# Altium PCB hall_strip.PcbDoc (part 2 of 2)
Units mm, origin at the board's own origin, x right, y up, seen from the top; angles counter-clockwise.
Board outline 200 x 15 mm, 2 copper layers (Top Layer, Bottom Layer); 100 components, 6 nets, 261 pads, 183 vias.
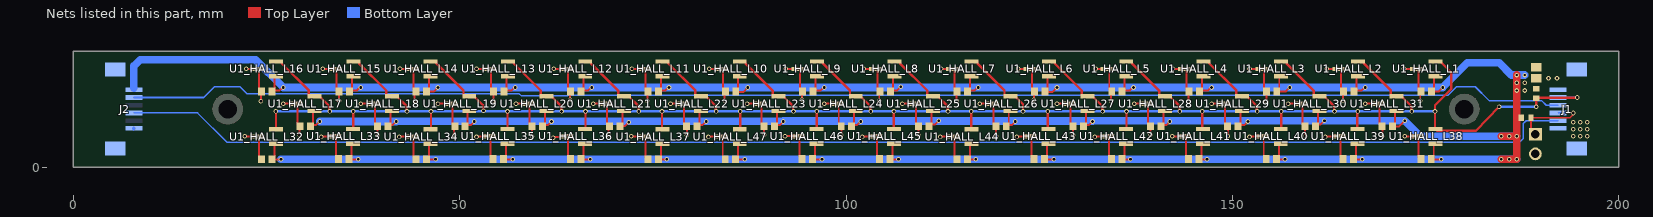
[diagram p2: the nets of this part, all layers, seen from the top]

## Part data
C1_HALL_L1 C1_HALL_L2 C1_HALL_L3 C1_HALL_L4 C1_HALL_L5 C1_HALL_L6 C1_HALL_L7 C1_HALL_L8 C1_HALL_L9 C1_HALL_L10 C1_HALL_L11 C1_HALL_L12 C1_HALL_L13 C1_HALL_L14 C1_HALL_L15 C1_HALL_L16 C1_HALL_L17 C1_HALL_L18 C1_HALL_L19 C1_HALL_L20 C1_HALL_L21 C1_HALL_L22 C1_HALL_L23 C1_HALL_L24 C1_HALL_L25 C1_HALL_L26 C1_HALL_L27 C1_HALL_L28 C1_HALL_L29 C1_HALL_L30 C1_HALL_L31 C1_HALL_L32 C1_HALL_L33 C1_HALL_L34 C1_HALL_L35 C1_HALL_L36 C1_HALL_L37 C1_HALL_L38 C1_HALL_L39 C1_HALL_L40 C1_HALL_L41 C1_HALL_L42 C1_HALL_L43 C1_HALL_L44 C1_HALL_L45 C1_HALL_L46 C1_HALL_L47: library part CMP-2006-03300-1, Manufacturer=Kemet, Part Number=C0603X104K5RACTU
C2: library part CMP-2007-03243-1, Manufacturer=Kemet, Part Number=C0805C106K8PACTU
J1 J2: library part CMP-1502-01454-1, "SMT ZIF Connectors WR-FPC, Horizontal, Bottom Contact, pitch 1 mm, 6 pins", Contact Resistance=20mOhm, Manufacturer="Wurth Elektronik", Operating Temperature=-25to85degC, Rated Current=1A, Withstanding Voltage=500VAC, Working Voltage=125VAC, Contact Design=BottomContact, Datasheet URL=https://katalog.we-online.de/em/datasheet/68610614422.pdf, Manufacturer URL=http://www.we-online.de, Mounting Technology=SMT, Orientation=Horizontal, Package Reference=68610614422, Packaging=TapeandReel, Part Number=68610614422, Pin Number=6, Pitch=1mm, Publisher=WurthElektronik, System=Connector
P1: library part CMP-1502-01059-1, "THT Angled Pin Header WR-PHD, Pitch 2.54 mm, Single Row, 2 pins", Contact Resistance=20mOhm, Manufacturer="Wurth Elektronik", Operating Temperature=-40to105degC, Rated Current=3A, Withstanding Voltage=500VAC, Working Voltage=250VAC, Datasheet URL=https://katalog.we-online.de/em/datasheet/6130xx11021.pdf, Gender=Male, Manufacturer URL=http://www.we-online.de, Mounting Technology=THT, Orientation=Angled, Package Reference=61300211021, Packaging=Bag, Part Number=61300211021, Pin Number=2, Pitch=2.54mm, Publisher=WurthElektronik, Row Number=Single
R1 R2: library part CMP-2000-00181-1, Manufacturer=Panasonic, Part Number=ERJ-3EKF1002V
U1_HALL_L1 U1_HALL_L2 U1_HALL_L3 U1_HALL_L4 U1_HALL_L5 U1_HALL_L6 U1_HALL_L7 U1_HALL_L8 U1_HALL_L9 U1_HALL_L10 U1_HALL_L11 U1_HALL_L12 U1_HALL_L13 U1_HALL_L14 U1_HALL_L15 U1_HALL_L16 U1_HALL_L17 U1_HALL_L18 U1_HALL_L19 U1_HALL_L20 U1_HALL_L21 U1_HALL_L22 U1_HALL_L23 U1_HALL_L24 U1_HALL_L25 U1_HALL_L26 U1_HALL_L27 U1_HALL_L28 U1_HALL_L29 U1_HALL_L30 U1_HALL_L31 U1_HALL_L32 U1_HALL_L33 U1_HALL_L34 U1_HALL_L35 U1_HALL_L36 U1_HALL_L37 U1_HALL_L38 U1_HALL_L39 U1_HALL_L40 U1_HALL_L41 U1_HALL_L42 U1_HALL_L43 U1_HALL_L44 U1_HALL_L45 U1_HALL_L46 U1_HALL_L47: library part CMP-1148-00005-1, "Low Power Hall Switch, PG-SC59, Reel, Green", Manufacturer=Infineon, PartNumber=TLE4913, Bhyst (25degreesC) max="0.8 mT", Bop (25degreesC) min="3.5 mT", Brp (25degreesC) typ="2.7 mT", Chopped Hall Technology=TRUE, ComponentLink1Description="Manufacturer URL", ComponentLink1URL=http://www.infineon.com/, ComponentLink2Description=Datasheet, ComponentLink2URL=http://www.infineon.com/dgdl/TLE4913_Data_Sheet_2006_03_16.pdf?folderId=db3a30431689f4420116a096e1db033e&fileId=db3a304316f66ee80117544449e10647, ComponentLink3Description="Package Specification", ComponentLink3URL=http://www.infineon.com/dgdl/SC59-Package_Overview.pdf?folderId=db3a30431936bc4b01194dc0d34440b0&fileId=db3a30431936bc4b01194dd1aa1d40cf, DatasheetVersion="Rev. 2.2", Direction Detection=FALSE, Green=TRUE, Interface="open collector", Mounting Technology="Surface Mount", PackageDescription="3-Pin Semiconductor Package, 3 x 1.53 mm Body, 0.95 mm Pitch", PackageReference=PG-SC59, PackageVersion=Mar-08, Packing=Reel, Target Application="Consumer, Mobile (Low power)", Type="Omnipolar Switch"

## Free pads (board coordinates)
  round 4 hole 2.4 paste+0: 9(20,7.5) 10(180,7.5)

## Via types
v1: diameter 0.6, hole 0.35, Top Layer to Bottom Layer, 161 vias
v2: diameter 0.6, hole 0.3, Top Layer to Bottom Layer, 22 vias

## Nets (pads, with @x,y where several pads share a name; then routed paths per layer and width w, separated by ;. In a path a pad name is that pad's centre, name@x,y a point inside that pad or via, vN(x,y) a via of type N, cw(c..) or ccw(c..) an arc to the next point about the centre after c; other vN are vias at no path point)
GND: C1_HALL_L1.2 C1_HALL_L2.2 C1_HALL_L3.2 C1_HALL_L4.2 C1_HALL_L5.2 C1_HALL_L6.2 C1_HALL_L7.2 C1_HALL_L8.2 C1_HALL_L9.2 C1_HALL_L10.2 C1_HALL_L11.2 C1_HALL_L12.2 C1_HALL_L13.2 C1_HALL_L14.2 C1_HALL_L15.2 C1_HALL_L16.2 C1_HALL_L17.2 C1_HALL_L18.2 C1_HALL_L19.2 C1_HALL_L20.2 C1_HALL_L21.2 C1_HALL_L22.2 C1_HALL_L23.2 C1_HALL_L24.2 C1_HALL_L25.2 C1_HALL_L26.2 C1_HALL_L27.2 C1_HALL_L28.2 C1_HALL_L29.2 C1_HALL_L30.2 C1_HALL_L31.2 C1_HALL_L32.2 C1_HALL_L33.2 C1_HALL_L34.2 C1_HALL_L35.2 C1_HALL_L36.2 C1_HALL_L37.2 C1_HALL_L38.2 C1_HALL_L39.2 C1_HALL_L40.2 C1_HALL_L41.2 C1_HALL_L42.2 C1_HALL_L43.2 C1_HALL_L44.2 C1_HALL_L45.2 C1_HALL_L46.2 C1_HALL_L47.2 C2.1 J1.6 J1.MP1 J1.MP2 J2.1 J2.MP1 J2.MP2 P1.2 U1_HALL_L1.3 U1_HALL_L2.3 U1_HALL_L3.3 U1_HALL_L4.3 U1_HALL_L5.3 U1_HALL_L6.3 U1_HALL_L7.3 U1_HALL_L8.3 U1_HALL_L9.3 U1_HALL_L10.3 U1_HALL_L11.3 U1_HALL_L12.3 U1_HALL_L13.3 U1_HALL_L14.3 U1_HALL_L15.3 U1_HALL_L16.3 U1_HALL_L17.3 U1_HALL_L18.3 U1_HALL_L19.3 U1_HALL_L20.3 U1_HALL_L21.3 U1_HALL_L22.3 U1_HALL_L23.3 U1_HALL_L24.3 U1_HALL_L25.3 U1_HALL_L26.3 U1_HALL_L27.3 U1_HALL_L28.3 U1_HALL_L29.3 U1_HALL_L30.3 U1_HALL_L31.3 U1_HALL_L32.3 U1_HALL_L33.3 U1_HALL_L34.3 U1_HALL_L35.3 U1_HALL_L36.3 U1_HALL_L37.3 U1_HALL_L38.3 U1_HALL_L39.3 U1_HALL_L40.3 U1_HALL_L41.3 U1_HALL_L42.3 U1_HALL_L43.3 U1_HALL_L44.3 U1_HALL_L45.3 U1_HALL_L46.3 U1_HALL_L47.3 | length 263.5
  Top Layer w0.254: v1(22.2,4) 22.225,3.975 23.833,3.975 U1_HALL_L32.3@23.858,3.95 23.912,3.95 24.06,3.802 24.06,1.335 C1_HALL_L32.2@24.383,1.012 ; v1(22.4,12.7) U1_HALL_L16.3@23.858,12.7 23.912,12.7 24.06,12.552 24.06,10.085 C1_HALL_L16.2@24.383,9.762 24.3,9.679 v1(24.3,8.5) ; v1(27.2,8.2) U1_HALL_L17.3@28.85,8.2 28.904,8.2 29.052,8.052 29.052,5.585 C1_HALL_L17.2@29.375,5.262 29.3,5.187 v1(29.3,4.1) ; v1(32.1,3.9) 32.139,3.939 33.754,3.939 U1_HALL_L33.3@33.794,3.979 33.848,3.979 33.996,3.831 33.996,1.364 C1_HALL_L33.2@34.319,1.041 ; v1(32.3,12.7) U1_HALL_L15.3@33.858,12.7 33.912,12.7 34.06,12.552 34.06,10.085 C1_HALL_L15.2@34.383,9.762 34.4,9.745 v1(34.4,8.6) ; v1(37.2,8.2) U1_HALL_L18.3@38.858,8.2 38.912,8.2 39.06,8.052 39.06,5.585 C1_HALL_L18.2@39.383,5.262 39.4,5.245 v1(39.4,4.1) ; v1(42.2,3.9) 42.225,3.925 43.825,3.925 U1_HALL_L34.3@43.85,3.95 43.904,3.95 44.052,3.802 44.052,1.335 C1_HALL_L34.2@44.375,1.012 ; v1(42.3,12.7) U1_HALL_L14.3@43.858,12.7 43.912,12.7 44.06,12.552 44.06,10.085 C1_HALL_L14.2@44.383,9.762 44.2,9.579 v1(44.2,8.6) ; v1(47.2,8.2) U1_HALL_L19.3@48.858,8.2 48.912,8.2 49.06,8.052 49.06,5.585 C1_HALL_L19.2@49.383,5.262 49.3,5.179 v1(49.3,4.1) ; v1(52.2,3.9) 52.239,3.939 53.754,3.939 U1_HALL_L35.3@53.794,3.979 53.848,3.979 53.996,3.831 53.996,1.364 C1_HALL_L35.2@54.319,1.041 ; v1(52.2,12.7) U1_HALL_L13.3@53.858,12.7 53.912,12.7 54.06,12.552 54.06,10.085 C1_HALL_L13.2@54.383,9.762 54.4,9.745 v1(54.4,8.6) ; v1(57.3,8.2) U1_HALL_L20.3@58.858,8.2 58.912,8.2 59.06,8.052 59.06,5.585 C1_HALL_L20.2@59.383,5.262 59.4,5.245 v1(59.4,4) ; v1(62.1,3.8) 62.166,3.866 63.737,3.866 U1_HALL_L36.3@63.85,3.979 63.904,3.979 64.052,3.831 64.052,1.364 C1_HALL_L36.2@64.375,1.041 ; v1(62.2,12.7) U1_HALL_L12.3@63.858,12.7 63.912,12.7 64.06,12.552 64.06,10.085 C1_HALL_L12.2@64.383,9.762 64.3,9.679 v1(64.3,8.7) ; v1(67.3,8.2) U1_HALL_L21.3@68.858,8.2 68.912,8.2 69.06,8.052 69.06,5.585 C1_HALL_L21.2@69.383,5.262 69.3,5.179 v1(69.3,4.1) ; v1(72.2,4) 72.225,3.975 73.825,3.975 U1_HALL_L37.3@73.85,3.95 73.904,3.95 74.052,3.802 74.052,1.335 C1_HALL_L37.2@74.375,1.012 ; v1(72.3,12.7) U1_HALL_L11.3@73.858,12.7 73.912,12.7 74.06,12.552 74.06,10.085 C1_HALL_L11.2@74.383,9.762 74.3,9.679 v1(74.3,8.6) ; v1(77.3,8.2) U1_HALL_L22.3@78.858,8.2 78.912,8.2 79.06,8.052 79.06,5.585 C1_HALL_L22.2@79.383,5.262 79.4,5.245 v1(79.4,4.1) ; v1(82.2,3.9) 82.225,3.925 83.825,3.925 U1_HALL_L47.3@83.85,3.95 83.904,3.95 84.052,3.802 84.052,1.335 C1_HALL_L47.2@84.375,1.012 ; v1(82.3,12.7) U1_HALL_L10.3@83.858,12.7 83.912,12.7 84.06,12.552 84.06,10.085 C1_HALL_L10.2@84.383,9.762 84.3,9.679 v1(84.3,8.6) ; v1(87.2,8.2) U1_HALL_L23.3@88.858,8.2 88.912,8.2 89.06,8.052 89.06,5.585 C1_HALL_L23.2@89.383,5.262 89.4,5.245 v1(89.4,4.2) ; v1(92.1,4) 92.111,3.989 93.783,3.989 U1_HALL_L46.3@93.794,3.979 93.848,3.979 93.996,3.831 93.996,1.364 C1_HALL_L46.2@94.319,1.041 ; v1(92.2,12.7) U1_HALL_L9.3@93.858,12.7 93.912,12.7 94.06,12.552 94.06,10.085 C1_HALL_L9.2@94.383,9.762 94.3,9.679 v1(94.3,8.7) ; v1(97.2,8.2) U1_HALL_L24.3@98.858,8.2 98.912,8.2 99.06,8.052 99.06,5.585 C1_HALL_L24.2@99.383,5.262 99.4,5.245 v1(99.4,4.1) ; v1(102.1,3.9) 102.139,3.939 103.754,3.939 U1_HALL_L45.3@103.794,3.979 103.848,3.979 103.996,3.831 103.996,1.364 C1_HALL_L45.2@104.319,1.041 ; v1(102.3,12.7) U1_HALL_L8.3@103.858,12.7 103.912,12.7 104.06,12.552 104.06,10.085 C1_HALL_L8.2@104.383,9.762 104.3,9.679 v1(104.3,8.6) ; v1(107.3,8.2) U1_HALL_L25.3@108.858,8.2 108.912,8.2 109.06,8.052 109.06,5.585 C1_HALL_L25.2@109.383,5.262 109.4,5.245 v1(109.4,4.1) ; v1(112.2,3.9) 112.225,3.925 113.825,3.925 U1_HALL_L44.3@113.85,3.95 113.904,3.95 114.052,3.802 114.052,1.335 C1_HALL_L44.2@114.375,1.012 ; v1(112.3,12.7) U1_HALL_L7.3@113.858,12.7 113.912,12.7 114.06,12.552 114.06,10.085 C1_HALL_L7.2@114.383,9.762 114.3,9.679 v1(114.3,8.5) ; v1(117.3,8.2) U1_HALL_L26.3@118.858,8.2 118.912,8.2 119.06,8.052 119.06,5.585 C1_HALL_L26.2@119.383,5.262 119.4,5.245 v1(119.4,4) ; v1(122.1,3.9) 122.139,3.939 123.754,3.939 U1_HALL_L43.3@123.794,3.979 123.848,3.979 123.996,3.831 123.996,1.364 C1_HALL_L43.2@124.319,1.041 ; v1(122.3,12.7) U1_HALL_L6.3@123.858,12.7 123.912,12.7 124.06,12.552 124.06,10.085 C1_HALL_L6.2@124.383,9.762 124.3,9.679 v1(124.3,8.7) ; v1(127.3,8.2) U1_HALL_L27.3@128.858,8.2 128.912,8.2 129.06,8.052 129.06,5.585 C1_HALL_L27.2@129.383,5.262 129.4,5.245 v1(129.4,4.1) ; v1(132.2,3.9) 132.239,3.939 133.811,3.939 U1_HALL_L42.3@133.85,3.979 133.904,3.979 134.052,3.831 134.052,1.364 C1_HALL_L42.2@134.375,1.041 ; v1(132.3,12.7) U1_HALL_L5.3@133.858,12.7 133.912,12.7 134.06,12.552 134.06,10.085 C1_HALL_L5.2@134.383,9.762 134.3,9.679 v1(134.3,8.5) ; v1(137.3,8.2) U1_HALL_L28.3@138.858,8.2 138.912,8.2 139.06,8.052 139.06,5.585 C1_HALL_L28.2@139.383,5.262 139.4,5.245 v1(139.4,4.2) ; v1(142.2,4) 142.221,3.979 U1_HALL_L41.3@143.769,3.979 143.823,3.979 143.971,3.831 143.971,1.364 C1_HALL_L41.2@144.294,1.041 ; v1(142.3,12.7) U1_HALL_L4.3@143.858,12.7 143.912,12.7 144.06,12.552 144.06,10.085 C1_HALL_L4.2@144.383,9.762 144.3,9.679 v1(144.3,8.5) ; v1(147.3,8.2) U1_HALL_L29.3@148.858,8.2 148.912,8.2 149.06,8.052 149.06,5.585 C1_HALL_L29.2@149.383,5.262 149.4,5.245 v1(149.4,4) ; v1(152.2,3.9) 152.239,3.939 153.811,3.939 U1_HALL_L40.3@153.85,3.979 153.904,3.979 154.052,3.831 154.052,1.364 C1_HALL_L40.2@154.375,1.041 ; v1(152.2,12.7) U1_HALL_L3.3@153.858,12.7 153.912,12.7 154.06,12.552 154.06,10.085 C1_HALL_L3.2@154.383,9.762 154.4,9.745 v1(154.4,8.5) ; v1(157.2,8.2) U1_HALL_L30.3@158.85,8.2 158.904,8.2 159.052,8.052 159.052,5.585 C1_HALL_L30.2@159.375,5.262 159.4,5.237 v1(159.4,4) ; v1(162,3.9) 162.039,3.939 163.729,3.939 U1_HALL_L39.3@163.769,3.979 163.823,3.979 163.971,3.831 163.971,1.364 C1_HALL_L39.2@164.294,1.041 ; v1(162.2,12.7) U1_HALL_L2.3@163.858,12.7 163.912,12.7 164.06,12.552 164.06,10.085 C1_HALL_L2.2@164.383,9.762 164.3,9.679 v1(164.3,8.6) ; v1(167.2,8.2) U1_HALL_L31.3@168.85,8.2 168.904,8.2 169.052,8.052 169.052,5.585 C1_HALL_L31.2@169.375,5.262 169.4,5.237 v1(169.4,4) ; v1(172.2,12.7) U1_HALL_L1.3@173.858,12.7 173.912,12.7 174.06,12.552 174.06,10.085 C1_HALL_L1.2@174.383,9.762 174.3,9.679 v1(174.3,8.6) ; v1(172.3,4) 172.4,4 172.421,3.979 U1_HALL_L38.3@173.85,3.979 173.904,3.979 174.052,3.831 174.052,1.364 C1_HALL_L38.2@174.375,1.041
  other v2: 194.1,4 195,4 195.9,4 194.1,4.9 195,4.9 195.9,4.9 194.1,5.8 195,5.8 195.9,5.8
GPIO_EXT: J1.5 J2.3 | length 188.2
  Bottom Layer w0.203: J2.3@7.85,7 16.1,7 19.905,3.195 187.133,3.195 187.605,3.667 187.605,5.586 188.019,6 J1.5@192.15,6
GPIO_INT: J1.4 P1.1 R2.1 | length 10.2
  Top Layer w0.203: P1.1@189.2,4.24 188.625,4.815 R2.1@188.625,6.4 193.7,6.4 194.116,6.816 194.116,6.984 v1(194.1,7)
  Bottom Layer w0.203: J1.4@192.15,7 v1(194.1,7)
HALL47: J1.2 R1.1 U1_HALL_L1.2 U1_HALL_L2.2 U1_HALL_L3.2 U1_HALL_L4.2 U1_HALL_L5.2 U1_HALL_L6.2 U1_HALL_L7.2 U1_HALL_L8.2 U1_HALL_L9.2 U1_HALL_L10.2 U1_HALL_L11.2 U1_HALL_L12.2 U1_HALL_L13.2 U1_HALL_L14.2 U1_HALL_L15.2 U1_HALL_L16.2 U1_HALL_L17.2 U1_HALL_L18.2 U1_HALL_L19.2 U1_HALL_L20.2 U1_HALL_L21.2 U1_HALL_L22.2 U1_HALL_L23.2 U1_HALL_L24.2 U1_HALL_L25.2 U1_HALL_L26.2 U1_HALL_L27.2 U1_HALL_L28.2 U1_HALL_L29.2 U1_HALL_L30.2 U1_HALL_L31.2 U1_HALL_L32.2 U1_HALL_L33.2 U1_HALL_L34.2 U1_HALL_L35.2 U1_HALL_L36.2 U1_HALL_L37.2 U1_HALL_L38.2 U1_HALL_L39.2 U1_HALL_L40.2 U1_HALL_L41.2 U1_HALL_L42.2 U1_HALL_L43.2 U1_HALL_L44.2 U1_HALL_L45.2 U1_HALL_L46.2 U1_HALL_L47.2 | length 374.7
  Top Layer w0.305: v1(26.2,7.2) 26.258,7.142 U1_HALL_L32.2@26.258,4.9 ; U1_HALL_L16.2@26.258,13.65 26.883,13.65 27.006,13.527 27.006,13.394 30.502,9.898 30.502,9.273 30.625,9.15 U1_HALL_L17.2@31.25,9.15 31.875,9.15 33.144,7.881 33.144,7.256 v1(33.2,7.2) ; U1_HALL_L33.2@36.194,4.929 36.25,4.985 v1(36.25,7.2) ; U1_HALL_L15.2@36.258,13.65 36.883,13.65 37.006,13.527 37.006,13.402 40.51,9.898 40.51,9.273 40.633,9.15 U1_HALL_L18.2@41.258,9.15 41.883,9.15 43.144,7.889 43.144,7.256 v1(43.2,7.2) ; U1_HALL_L34.2@46.25,4.9 46.3,4.95 v1(46.3,7.2) ; U1_HALL_L14.2@46.258,13.65 46.883,13.65 47.006,13.527 47.006,13.402 50.51,9.898 50.51,9.273 50.633,9.15 U1_HALL_L19.2@51.258,9.15 51.883,9.15 53.044,7.989 53.044,7.356 v1(53.1,7.3) ; U1_HALL_L35.2@56.194,4.929 56.2,4.935 v1(56.2,7.2) ; U1_HALL_L13.2@56.258,13.65 56.883,13.65 57.006,13.527 57.006,13.402 60.51,9.898 60.51,9.273 60.633,9.15 U1_HALL_L20.2@61.258,9.15 61.883,9.15 63.144,7.889 63.144,7.256 v1(63.2,7.2) ; U1_HALL_L36.2@66.25,4.929 66.3,4.979 v1(66.3,7.2) ; U1_HALL_L12.2@66.258,13.65 66.883,13.65 67.006,13.527 67.006,13.402 70.51,9.898 70.51,9.273 70.633,9.15 U1_HALL_L21.2@71.258,9.15 71.883,9.15 73.144,7.889 73.144,7.256 v1(73.2,7.2) ; v1(76.2,7.2) 76.2,4.95 U1_HALL_L37.2@76.25,4.9 ; U1_HALL_L11.2@76.258,13.65 76.883,13.65 77.006,13.527 77.006,13.402 80.51,9.898 80.51,9.273 80.633,9.15 U1_HALL_L22.2@81.258,9.15 81.883,9.15 83.144,7.889 83.144,7.256 v1(83.2,7.2) ; U1_HALL_L47.2@86.25,4.9 86.3,4.95 v1(86.3,7.2) ; U1_HALL_L10.2@86.258,13.65 86.883,13.65 87.006,13.527 87.006,13.402 90.51,9.898 90.51,9.273 90.633,9.15 U1_HALL_L23.2@91.258,9.15 91.883,9.15 93.144,7.889 93.144,7.256 v1(93.2,7.2) ; U1_HALL_L46.2@96.194,4.929 96.2,4.935 v1(96.2,7.2) ; U1_HALL_L9.2@96.258,13.65 96.883,13.65 97.006,13.527 97.006,13.402 100.51,9.898 100.51,9.273 100.633,9.15 U1_HALL_L24.2@101.258,9.15 101.883,9.15 103.144,7.889 103.144,7.256 v1(103.2,7.2) ; U1_HALL_L45.2@106.194,4.929 106.2,4.935 v1(106.2,7.2) ; U1_HALL_L8.2@106.258,13.65 106.883,13.65 107.006,13.527 107.006,13.402 110.51,9.898 110.51,9.273 110.633,9.15 U1_HALL_L25.2@111.258,9.15 111.883,9.15 113.144,7.889 113.144,7.256 v1(113.2,7.2) ; v1(116.2,7.2) 116.2,4.95 U1_HALL_L44.2@116.25,4.9 ; U1_HALL_L7.2@116.258,13.65 116.883,13.65 117.006,13.527 117.006,13.402 120.51,9.898 120.51,9.273 120.633,9.15 U1_HALL_L26.2@121.258,9.15 121.883,9.15 122.9,8.133 v1(122.9,7.2) ; v1(126.1,7.2) 126.1,5.023 U1_HALL_L43.2@126.194,4.929 ; U1_HALL_L6.2@126.258,13.65 126.883,13.65 127.006,13.527 127.006,13.402 130.51,9.898 130.51,9.273 130.633,9.15 U1_HALL_L27.2@131.258,9.15 131.883,9.15 133.144,7.889 133.144,7.256 v1(133.2,7.2) ; U1_HALL_L42.2@136.25,4.929 136.3,4.979 v1(136.3,7.2) ; U1_HALL_L5.2@136.258,13.65 136.883,13.65 137.006,13.527 137.006,13.402 140.51,9.898 140.51,9.273 140.633,9.15 U1_HALL_L28.2@141.258,9.15 141.883,9.15 143.144,7.889 143.144,7.256 v1(143.2,7.2) ; v1(146.1,7.2) 146.1,4.998 U1_HALL_L41.2@146.169,4.929 ; U1_HALL_L4.2@146.258,13.65 146.883,13.65 147.006,13.527 147.006,13.402 150.51,9.898 150.51,9.273 150.633,9.15 U1_HALL_L29.2@151.258,9.15 151.883,9.15 153.144,7.889 153.144,7.256 v1(153.2,7.2) ; U1_HALL_L40.2@156.25,4.929 156.3,4.979 v1(156.3,7.2) ; U1_HALL_L3.2@156.258,13.65 156.883,13.65 157.006,13.527 157.006,13.394 160.502,9.898 160.502,9.273 160.625,9.15 U1_HALL_L30.2@161.25,9.15 161.875,9.15 163.144,7.881 163.144,7.256 v1(163.2,7.2) ; U1_HALL_L39.2@166.169,4.929 166.169,7.169 v1(166.2,7.2) ; U1_HALL_L2.2@166.258,13.65 166.883,13.65 167.006,13.527 167.006,13.394 170.502,9.898 170.502,9.273 170.625,9.15 U1_HALL_L31.2@171.25,9.15 171.875,9.15 173.144,7.881 173.144,7.256 v1(173.2,7.2) ; U1_HALL_L1.2@176.258,13.65 176.883,13.65 178.3,12.233 178.3,10.1 176.2,8 v1(176.2,7.2) 176.2,4.979 U1_HALL_L38.2@176.25,4.929 176.479,4.7 181.5,4.7 v1(184.5,7.8) ; v1(189.3,7.8) R1.1@189.3,8.875 189.369,8.944 194.544,8.944 v1(194.6,9)
  Bottom Layer w0.305: v1(26.2,7.2) v1(33.2,7.2) v1(36.25,7.2) v1(43.2,7.2) v1(46.3,7.2) v1(56.2,7.2) v1(63.2,7.2) v1(66.3,7.2) v1(73.2,7.2) v1(76.2,7.2) v1(83.2,7.2) v1(86.3,7.2) v1(93.2,7.2) v1(96.2,7.2) v1(103.2,7.2) v1(106.2,7.2) v1(113.2,7.2) v1(116.2,7.2) v1(122.9,7.2) v1(126.1,7.2) v1(133.2,7.2) v1(136.3,7.2) v1(143.2,7.2) v1(146.1,7.2) v1(153.2,7.2) v1(156.3,7.2) v1(163.2,7.2) v1(166.2,7.2) v1(173.2,7.2) v1(176.2,7.2) ; v1(184.5,7.8) v1(189.3,7.8) ; J1.2@192.15,9 v1(194.6,9)
HALL_EXT: J1.3 J2.5 | length 186.9
  Bottom Layer w0.203: J2.5@7.85,9 16.9,9 18.3,10.4 21.6,10.4 22.505,9.495 57.705,9.495 58,9.2 63.945,9.2 64.049,9.305 177.905,9.305 179,10.4 181.4,10.4 183.2,8.6 190,8.6 190.6,8 J1.3@192.15,8
VCC: C1_HALL_L1.1 C1_HALL_L2.1 C1_HALL_L3.1 C1_HALL_L4.1 C1_HALL_L5.1 C1_HALL_L6.1 C1_HALL_L7.1 C1_HALL_L8.1 C1_HALL_L9.1 C1_HALL_L10.1 C1_HALL_L11.1 C1_HALL_L12.1 C1_HALL_L13.1 C1_HALL_L14.1 C1_HALL_L15.1 C1_HALL_L16.1 C1_HALL_L17.1 C1_HALL_L18.1 C1_HALL_L19.1 C1_HALL_L20.1 C1_HALL_L21.1 C1_HALL_L22.1 C1_HALL_L23.1 C1_HALL_L24.1 C1_HALL_L25.1 C1_HALL_L26.1 C1_HALL_L27.1 C1_HALL_L28.1 C1_HALL_L29.1 C1_HALL_L30.1 C1_HALL_L31.1 C1_HALL_L32.1 C1_HALL_L33.1 C1_HALL_L34.1 C1_HALL_L35.1 C1_HALL_L36.1 C1_HALL_L37.1 C1_HALL_L38.1 C1_HALL_L39.1 C1_HALL_L40.1 C1_HALL_L41.1 C1_HALL_L42.1 C1_HALL_L43.1 C1_HALL_L44.1 C1_HALL_L45.1 C1_HALL_L46.1 C1_HALL_L47.1 C2.2 J1.1 J2.6 R1.2 R2.2 U1_HALL_L1.1 U1_HALL_L2.1 U1_HALL_L3.1 U1_HALL_L4.1 U1_HALL_L5.1 U1_HALL_L6.1 U1_HALL_L7.1 U1_HALL_L8.1 U1_HALL_L9.1 U1_HALL_L10.1 U1_HALL_L11.1 U1_HALL_L12.1 U1_HALL_L13.1 U1_HALL_L14.1 U1_HALL_L15.1 U1_HALL_L16.1 U1_HALL_L17.1 U1_HALL_L18.1 U1_HALL_L19.1 U1_HALL_L20.1 U1_HALL_L21.1 U1_HALL_L22.1 U1_HALL_L23.1 U1_HALL_L24.1 U1_HALL_L25.1 U1_HALL_L26.1 U1_HALL_L27.1 U1_HALL_L28.1 U1_HALL_L29.1 U1_HALL_L30.1 U1_HALL_L31.1 U1_HALL_L32.1 U1_HALL_L33.1 U1_HALL_L34.1 U1_HALL_L35.1 U1_HALL_L36.1 U1_HALL_L37.1 U1_HALL_L38.1 U1_HALL_L39.1 U1_HALL_L40.1 U1_HALL_L41.1 U1_HALL_L42.1 U1_HALL_L43.1 U1_HALL_L44.1 U1_HALL_L45.1 U1_HALL_L46.1 U1_HALL_L47.1 | length 684.1
  Top Layer w0.254: C1_HALL_L16.1@25.733,9.762 C1_HALL_L16.1@25.896,9.925 ; U1_HALL_L32.1@26.258,3 26.204,3 26.056,2.852 26.056,1.335 C1_HALL_L32.1@25.733,1.012 25.745,1 v1(26.9,1) ; U1_HALL_L16.1@26.258,11.75 26.204,11.75 26.056,11.602 26.056,10.085 C1_HALL_L16.1@25.896,9.925 ; v1(27.2,10.3) 27.106,10.3 26.731,9.925 C1_HALL_L16.1@25.896,9.925 ; C1_HALL_L17.1@30.725,5.262 C1_HALL_L17.1@30.881,5.418 ; U1_HALL_L17.1@31.25,7.25 31.196,7.25 31.048,7.102 31.048,5.585 C1_HALL_L17.1@30.881,5.418 ; v1(31.9,5.9) 31.418,5.418 C1_HALL_L17.1@30.881,5.418 ; C1_HALL_L15.1@35.733,9.762 C1_HALL_L15.1@35.896,9.925 ; U1_HALL_L33.1@36.194,3.029 36.14,3.029 35.992,2.881 35.992,1.364 C1_HALL_L33.1@35.669,1.041 35.71,1 v1(36.9,1) ; U1_HALL_L15.1@36.258,11.75 36.204,11.75 36.056,11.602 36.056,10.085 C1_HALL_L15.1@35.896,9.925 ; v1(37.2,10.3) 37.106,10.3 36.731,9.925 C1_HALL_L15.1@35.896,9.925 ; C1_HALL_L18.1@40.733,5.262 C1_HALL_L18.1@40.889,5.418 ; U1_HALL_L18.1@41.258,7.25 41.204,7.25 41.056,7.102 41.056,5.585 C1_HALL_L18.1@40.889,5.418 ; v1(41.8,5.9) 41.318,5.418 C1_HALL_L18.1@40.889,5.418 ; C1_HALL_L14.1@45.733,9.762 C1_HALL_L14.1@46.056,10.085 ; U1_HALL_L34.1@46.25,3 46.196,3 46.048,2.852 46.048,1.335 C1_HALL_L34.1@45.725,1.012 45.737,1 v1(46.9,1) ; U1_HALL_L14.1@46.258,11.75 46.204,11.75 46.056,11.602 C1_HALL_L14.1@46.056,10.085 ; v1(47.2,10.3) 46.7,9.8 46.056,9.8 C1_HALL_L14.1@46.056,10.085 ; C1_HALL_L19.1@50.733,5.262 C1_HALL_L19.1@50.889,5.418 ; U1_HALL_L19.1@51.258,7.25 51.204,7.25 51.056,7.102 51.056,5.585 C1_HALL_L19.1@50.889,5.418 ; v1(51.9,5.9) 51.418,5.418 C1_HALL_L19.1@50.889,5.418 ; C1_HALL_L13.1@55.733,9.762 55.896,9.925 56.731,9.925 57.106,10.3 v1(57.2,10.3) ; C1_HALL_L13.1@55.971,10 56.056,10.085 56.056,11.602 56.204,11.75 U1_HALL_L13.1@56.258,11.75 ; U1_HALL_L35.1@56.194,3.029 56.14,3.029 55.992,2.881 55.992,1.364 C1_HALL_L35.1@55.669,1.041 55.71,1 v1(56.9,1) ; C1_HALL_L20.1@60.733,5.262 C1_HALL_L20.1@60.889,5.418 ; U1_HALL_L20.1@61.258,7.25 61.204,7.25 61.056,7.102 61.056,5.585 C1_HALL_L20.1@60.889,5.418 ; v1(61.9,5.9) 61.418,5.418 C1_HALL_L20.1@60.889,5.418 ; C1_HALL_L12.1@65.733,9.762 65.896,9.925 66.631,9.925 67.006,10.3 v1(67.1,10.3) ; C1_HALL_L12.1@65.971,10 66.056,10.085 66.056,11.602 66.204,11.75 U1_HALL_L12.1@66.258,11.75 ; U1_HALL_L36.1@66.25,3.029 66.196,3.029 66.048,2.881 66.048,1.364 C1_HALL_L36.1@65.725,1.041 65.766,1 v1(66.9,1) ; C1_HALL_L21.1@70.733,5.262 C1_HALL_L21.1@70.789,5.318 ; U1_HALL_L21.1@71.258,7.25 71.204,7.25 71.056,7.102 71.056,5.585 C1_HALL_L21.1@70.789,5.318 ; v1(71.9,5.8) 71.418,5.318 C1_HALL_L21.1@70.789,5.318 ; C1_HALL_L11.1@75.733,9.762 75.896,9.925 76.631,9.925 77.006,10.3 v1(77.1,10.3) ; C1_HALL_L11.1@75.971,10 76.056,10.085 76.056,11.602 76.204,11.75 U1_HALL_L11.1@76.258,11.75 ; U1_HALL_L37.1@76.25,3 76.196,3 76.048,2.852 76.048,1.335 C1_HALL_L37.1@75.725,1.012 75.737,1 v1(76.8,1) ; C1_HALL_L22.1@80.733,5.262 C1_HALL_L22.1@80.889,5.418 ; U1_HALL_L22.1@81.258,7.25 81.204,7.25 81.056,7.102 81.056,5.585 C1_HALL_L22.1@80.889,5.418 ; v1(81.9,5.9) 81.418,5.418 C1_HALL_L22.1@80.889,5.418 ; C1_HALL_L10.1@85.733,9.762 C1_HALL_L10.1@86.056,10.085 ; U1_HALL_L47.1@86.25,3 86.196,3 86.048,2.852 86.048,1.335 C1_HALL_L47.1@85.725,1.012 85.737,1 v1(86.9,1) ; U1_HALL_L10.1@86.258,11.75 86.204,11.75 86.056,11.602 C1_HALL_L10.1@86.056,10.085 ; v1(87.3,10.3) 86.7,9.7 86.056,9.7 C1_HALL_L10.1@86.056,10.085 ; C1_HALL_L23.1@90.733,5.262 C1_HALL_L23.1@90.889,5.418 ; U1_HALL_L23.1@91.258,7.25 91.204,7.25 91.056,7.102 91.056,5.585 C1_HALL_L23.1@90.889,5.418 ; v1(91.9,5.9) 91.418,5.418 C1_HALL_L23.1@90.889,5.418 ; C1_HALL_L9.1@95.733,9.762 C1_HALL_L9.1@96.056,10.085 ; U1_HALL_L46.1@96.194,3.029 96.14,3.029 95.992,2.881 95.992,1.364 C1_HALL_L46.1@95.669,1.041 95.71,1 v1(96.9,1) ; U1_HALL_L9.1@96.258,11.75 96.204,11.75 96.056,11.602 C1_HALL_L9.1@96.056,10.085 ; v1(97.2,10.3) 97.106,10.3 96.731,9.925 96.056,9.925 C1_HALL_L9.1@96.056,10.085 ; C1_HALL_L24.1@100.733,5.262 C1_HALL_L24.1@100.889,5.418 ; U1_HALL_L24.1@101.258,7.25 101.204,7.25 101.056,7.102 101.056,5.585 C1_HALL_L24.1@100.889,5.418 ; v1(101.9,5.9) 101.418,5.418 C1_HALL_L24.1@100.889,5.418 ; C1_HALL_L8.1@105.733,9.762 106.056,9.762 C1_HALL_L8.1@106.056,9.925 ; U1_HALL_L45.1@106.194,3.029 106.14,3.029 105.992,2.881 105.992,1.364 C1_HALL_L45.1@105.669,1.041 105.71,1 v1(106.8,1) ; U1_HALL_L8.1@106.258,11.75 106.204,11.75 106.056,11.602 C1_HALL_L8.1@106.056,9.925 ; v1(107.1,10.4) 107.088,10.4 106.612,9.925 C1_HALL_L8.1@106.056,9.925 ; C1_HALL_L25.1@110.733,5.262 C1_HALL_L25.1@110.989,5.518 ; U1_HALL_L25.1@111.258,7.25 111.204,7.25 111.056,7.102 111.056,5.585 C1_HALL_L25.1@110.989,5.518 ; v1(112,6) 111.518,5.518 C1_HALL_L25.1@110.989,5.518 ; C1_HALL_L7.1@115.733,9.762 115.896,9.925 116.631,9.925 117.006,10.3 v1(117.1,10.3) ; C1_HALL_L7.1@116.056,10.085 116.056,11.602 116.204,11.75 U1_HALL_L7.1@116.258,11.75 ; U1_HALL_L44.1@116.25,3 116.196,3 116.048,2.852 116.048,1.335 C1_HALL_L44.1@115.725,1.012 115.737,1 v1(116.8,1) ; C1_HALL_L26.1@120.733,5.262 C1_HALL_L26.1@120.889,5.418 ; U1_HALL_L26.1@121.258,7.25 121.204,7.25 121.056,7.102 121.056,5.585 C1_HALL_L26.1@120.889,5.418 ; v1(121.9,5.9) 121.418,5.418 C1_HALL_L26.1@120.889,5.418 ; C1_HALL_L6.1@125.733,9.762 C1_HALL_L6.1@126.056,10.085 ; U1_HALL_L43.1@126.194,3.029 126.14,3.029 125.992,2.881 125.992,1.364 C1_HALL_L43.1@125.669,1.041 125.71,1 v1(126.9,1) ; U1_HALL_L6.1@126.258,11.75 126.204,11.75 126.056,11.602 C1_HALL_L6.1@126.056,10.085 ; v1(127.3,10.3) 126.7,9.7 126.056,9.7 C1_HALL_L6.1@126.056,10.085 ; C1_HALL_L27.1@130.733,5.262 C1_HALL_L27.1@130.889,5.418 ; U1_HALL_L27.1@131.258,7.25 131.204,7.25 131.056,7.102 131.056,5.585 C1_HALL_L27.1@130.889,5.418 ; v1(131.9,5.9) 131.418,5.418 C1_HALL_L27.1@130.889,5.418 ; C1_HALL_L5.1@135.733,9.762 C1_HALL_L5.1@136.056,10.085 ; U1_HALL_L42.1@136.25,3.029 136.196,3.029 136.048,2.881 136.048,1.364 C1_HALL_L42.1@135.725,1.041 135.766,1 v1(136.8,1) ; U1_HALL_L5.1@136.258,11.75 136.204,11.75 136.056,11.602 C1_HALL_L5.1@136.056,10.085 ; v1(137.2,10.3) 137.106,10.3 136.731,9.925 136.056,9.925 C1_HALL_L5.1@136.056,10.085 ; C1_HALL_L28.1@140.733,5.262 C1_HALL_L28.1@140.889,5.418 ; U1_HALL_L28.1@141.258,7.25 141.204,7.25 141.056,7.102 141.056,5.585 C1_HALL_L28.1@140.889,5.418 ; v1(141.9,5.9) 141.418,5.418 C1_HALL_L28.1@140.889,5.418 ; C1_HALL_L4.1@145.733,9.762 C1_HALL_L4.1@146.056,10.085 ; U1_HALL_L41.1@146.169,3.029 146.115,3.029 145.967,2.881 145.967,1.364 C1_HALL_L41.1@145.644,1.041 145.685,1 v1(146.7,1) ; U1_HALL_L4.1@146.258,11.75 146.204,11.75 146.056,11.602 C1_HALL_L4.1@146.056,10.085 ; v1(147.3,10.3) 147.2,10.3 146.8,9.9 146.056,9.9 C1_HALL_L4.1@146.056,10.085 ; C1_HALL_L29.1@150.733,5.262 C1_HALL_L29.1@150.889,5.418 ; U1_HALL_L29.1@151.258,7.25 151.204,7.25 151.056,7.102 151.056,5.585 C1_HALL_L29.1@150.889,5.418 ; v1(152,5.9) 151.518,5.418 C1_HALL_L29.1@150.889,5.418 ; C1_HALL_L3.1@155.733,9.762 C1_HALL_L3.1@155.771,9.8 ; U1_HALL_L40.1@156.25,3.029 156.196,3.029 156.048,2.881 156.048,1.364 C1_HALL_L40.1@155.725,1.041 155.766,1 v1(156.8,1) ; U1_HALL_L3.1@156.258,11.75 156.204,11.75 156.056,11.602 156.056,10.085 C1_HALL_L3.1@155.771,9.8 ; v1(157.4,10.3) 156.9,9.8 C1_HALL_L3.1@155.771,9.8 ; C1_HALL_L30.1@160.725,5.262 C1_HALL_L30.1@160.981,5.518 ; U1_HALL_L30.1@161.25,7.25 161.196,7.25 161.048,7.102 161.048,5.585 C1_HALL_L30.1@160.981,5.518 ; v1(161.9,6) 161.418,5.518 C1_HALL_L30.1@160.981,5.518 ; C1_HALL_L2.1@165.733,9.762 C1_HALL_L2.1@165.896,9.925 ; U1_HALL_L39.1@166.169,3.029 166.115,3.029 165.967,2.881 165.967,1.364 C1_HALL_L39.1@165.644,1.041 165.685,1 v1(166.8,1) ; U1_HALL_L2.1@166.258,11.75 166.204,11.75 166.056,11.602 166.056,10.085 C1_HALL_L2.1@165.896,9.925 ; v1(167.2,10.3) 167.106,10.3 166.731,9.925 C1_HALL_L2.1@165.896,9.925 ; U1_HALL_L31.1@171.25,7.25 171.196,7.25 171.048,7.102 171.048,5.585 C1_HALL_L31.1@170.725,5.262 171.562,5.262 v1(172.3,6) ; C1_HALL_L1.1@175.733,9.762 C1_HALL_L1.1@175.771,9.8 ; U1_HALL_L38.1@176.25,3.029 176.196,3.029 176.048,2.881 176.048,1.364 C1_HALL_L38.1@175.725,1.041 175.766,1 v1(177,1) ; U1_HALL_L1.1@176.258,11.75 176.204,11.75 176.056,11.602 176.056,10.085 C1_HALL_L1.1@175.771,9.8 ; v1(177.2,10.3) 176.7,9.8 C1_HALL_L1.1@175.771,9.8
  Top Layer w1: v2(184.8,1) v2(185.8,1) v1(186.8,1) v2(186.8,4) ; v2(184.8,4) v2(185.8,4) v2(186.8,4) ; v2(186.8,11.9) v2(186.8,10.9) v2(186.8,9.9) v2(186.8,4)
  Bottom Layer w1: J2.6@7.85,10.2 7.85,13.064 8.686,13.9 23.6,13.9 v1(27.2,10.3) v1(37.2,10.3) v1(47.2,10.3) v1(57.2,10.3) v1(67.1,10.3) v1(77.1,10.3) v1(87.3,10.3) v1(97.2,10.3) v1(117.1,10.3) v1(127.3,10.3) v1(137.2,10.3) v1(147.3,10.3) v1(157.4,10.3) v1(167.2,10.3) v1(177.2,10.3) 180.4,13.5 184.5,13.5 186.1,11.9 v2(186.8,11.9) v2(187.8,11.9) ; v1(26.9,1) v1(36.9,1) v1(46.9,1) v1(56.9,1) v1(66.9,1) v1(76.8,1) v1(86.9,1) v1(96.9,1) v1(106.8,1) v1(116.8,1) v1(126.9,1) v1(136.8,1) v1(146.7,1) v1(156.8,1) v1(166.8,1) v1(177,1) v2(184.8,1) v2(185.8,1) v1(186.8,1) ; v1(31.9,5.9) 41.8,5.908 51.9,5.915 61.9,5.922 71.9,5.929 81.9,5.936 91.9,5.943 101.9,5.95 112,5.957 121.9,5.964 131.9,5.971 141.9,5.978 152,5.986 161.9,5.993 v1(172.3,6) 174.3,4 v2(184.8,4) v2(185.8,4) v2(186.8,4)
  other v2: 187.8,9.9 187.8,10.9 190.9,11.5 192,11.5
pads on no net: J2.2 J2.4

## Polygon pours and split planes (outlines as drawn)
GND on Top Layer "GND_L01_P006" (solid, pour order 6): 0,0 200,0 200,15 0,15
VCC on Top Layer "VCC_L01_P004" (solid, remove dead copper, pour order 4): 190.4,9.3 190.4,10.7 190.45,10.75 193,10.75 193,12.4 186.3,12.4 186.3,9.3
no net on Top Layer "NONET_L01_P000" (solid, pour order 0): 520.319,323.215
GND on Bottom Layer "GND_L02_P008" (solid, pour order 8): 0,0 200,0 200,15 0,15
VCC on Bottom Layer "VCC_L02_P002" (solid, pour order 2): 193,11 193,12.4 186.3,12.4 186.3,9.4 190.4,9.4 193.9,9.4 193.9,11

## Silkscreen, mask and mechanical layers (free items; w line width, h text height)
Bottom Overlay:
  text "BIO26" at 176,2.9 h2
  text "©2019 Commonplace Development" at 41.5,1 h1.5
  text "Serendipity Searcher Sensors" at 176.2,1 h1.5
Outline:
  the board outline again, w0.254

## Dimensions
180,7.5 to 200,15 on Mechanical 1
20,7.5 to 0,15 on Mechanical 1

## Text inside footprints (layer, text, board x,y; h text height)
J1: Bottom Overlay "6" at 192.8,4.2 h1.02 r90; Bottom Overlay "1" at 192.8,11.1 h1.02 r90
J2: Bottom Overlay "1" at 7.2,3.9 h1.02 r270; Bottom Overlay "6" at 7.2,10.8 h1.02 r270